# Altium PCB relay.PcbDoc
Units mm, origin at the board's own origin, x right, y up, seen from the top; angles counter-clockwise.
Board outline 53.97 x 65.91 mm, 2 copper layers (Top Layer, Bottom Layer); 33 components, 27 nets, 138 pads, 1820 vias.
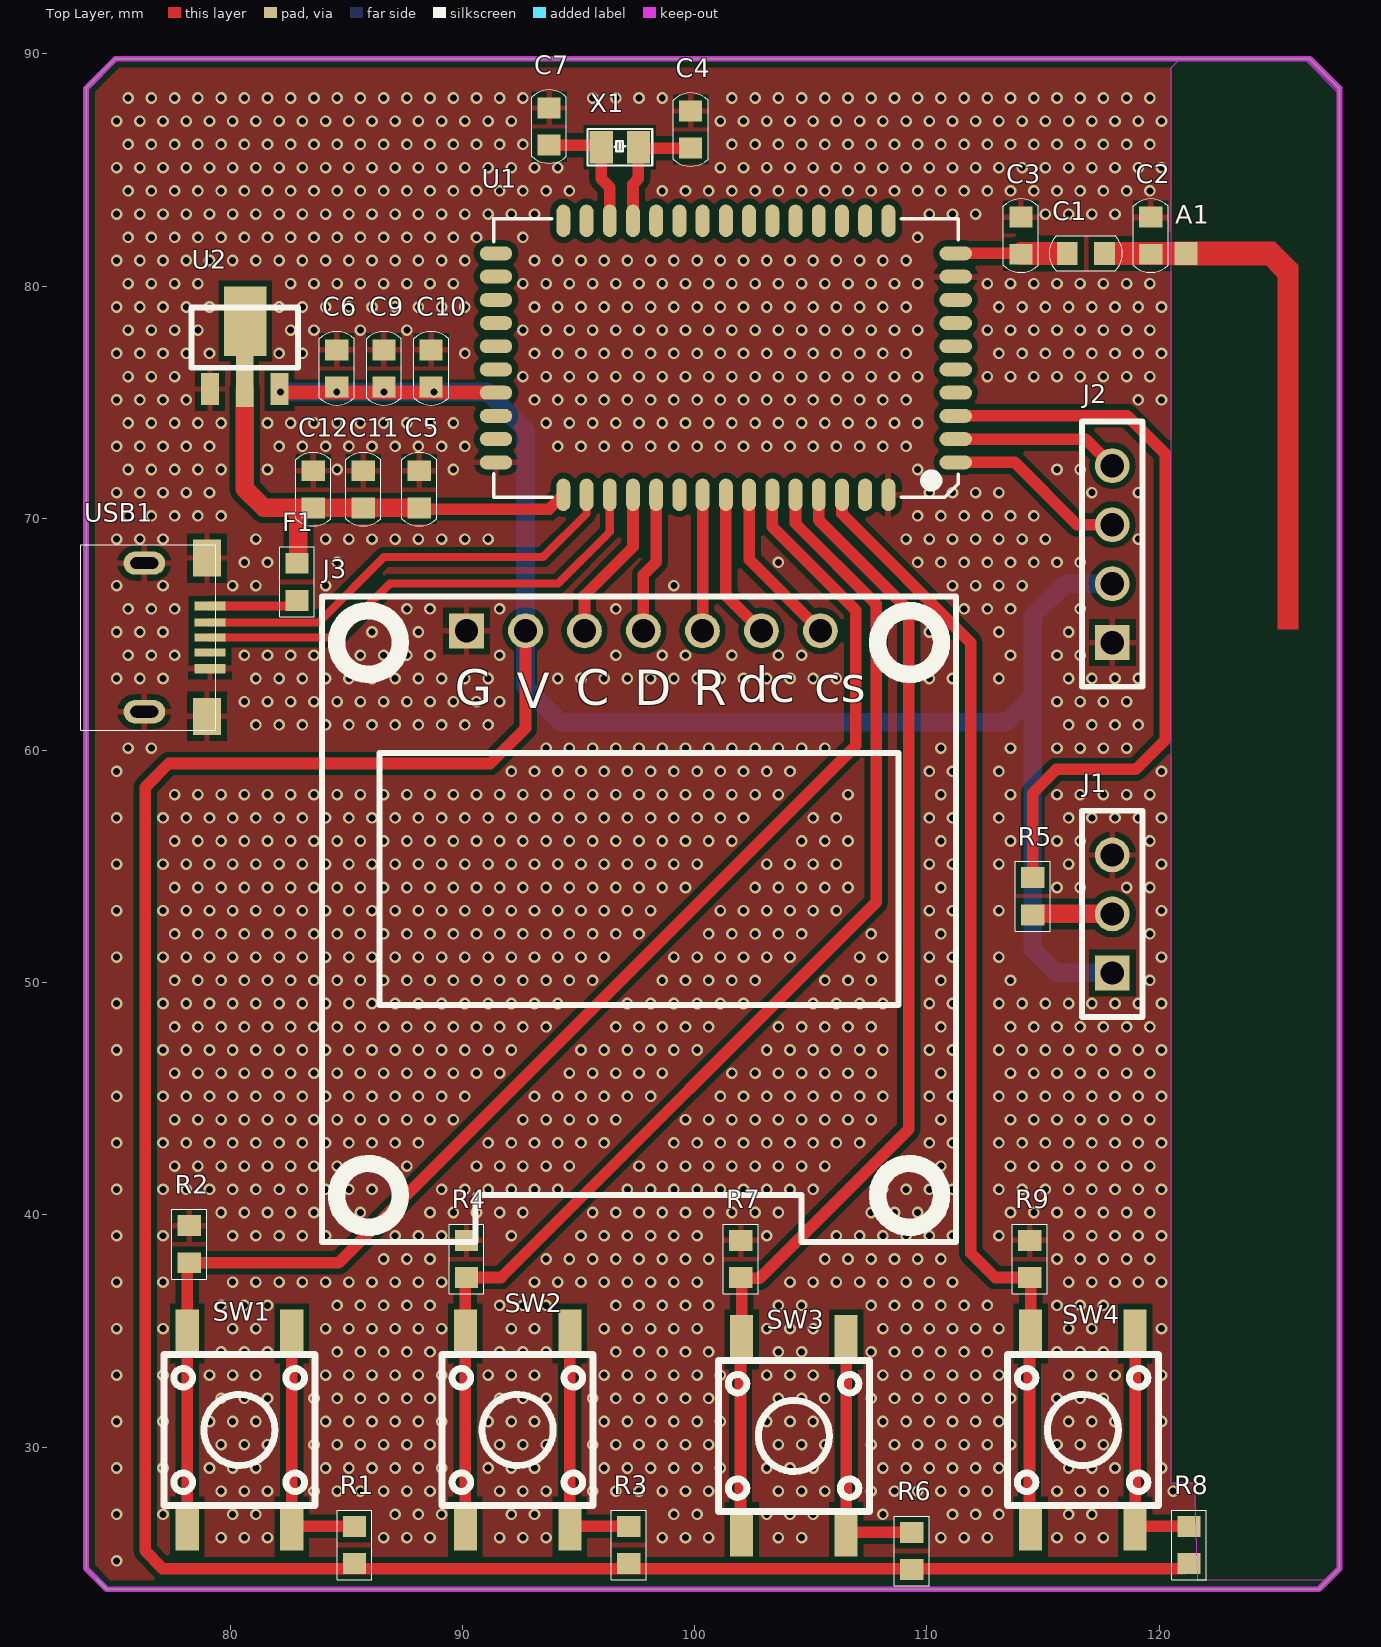
[diagram p0: Top Layer view]
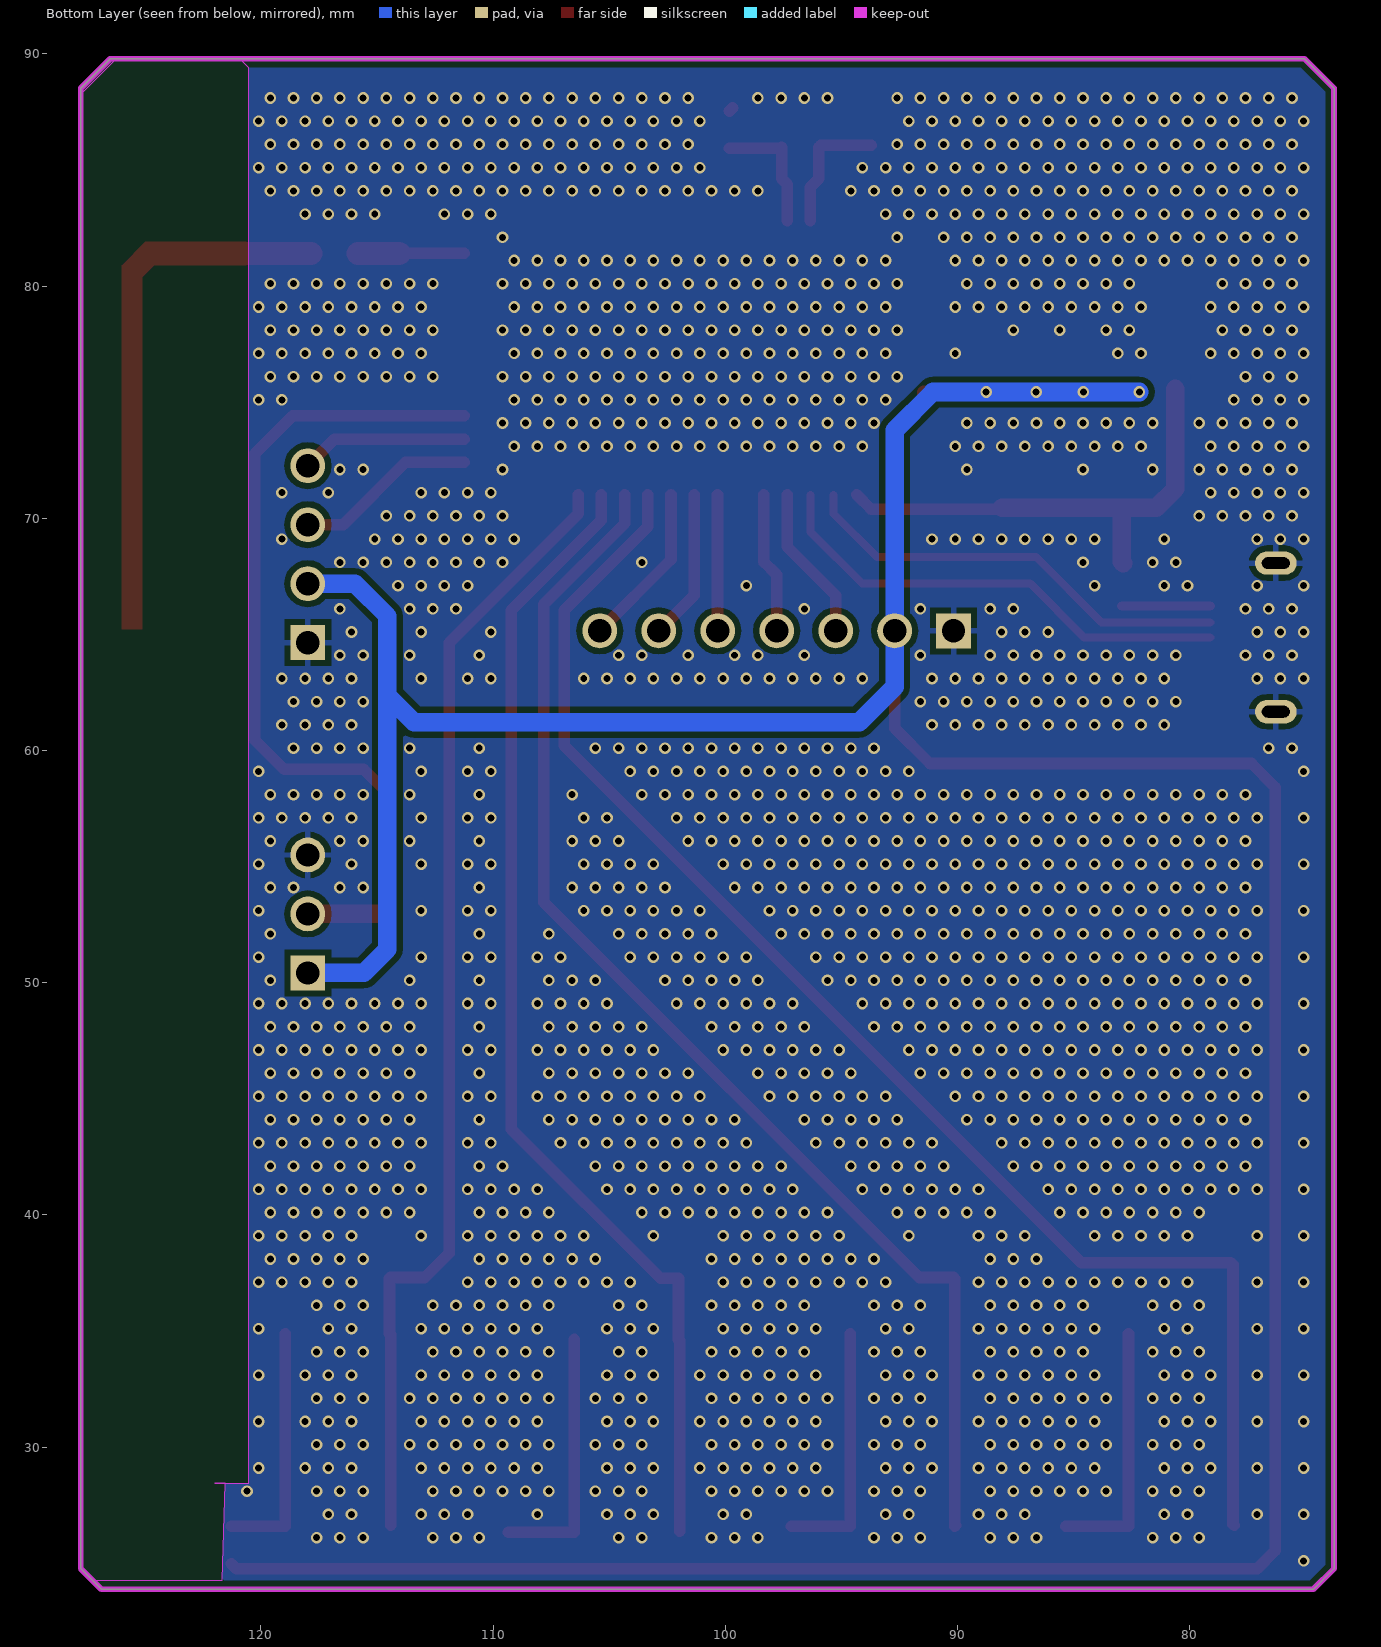
[diagram p1: Bottom Layer view, seen from below]

## Layer stack, top to bottom
Top Solder: solder mask 0.0102, Solder Resist, Dk 3.5
Top Layer: signal copper 0.0356
Dielectric 1: dielectric 0.32, FR-4, Dk 4.8
Bottom Layer: signal copper 0.0356
Bottom Solder: solder mask 0.0102, Solder Resist, Dk 3.5

## Board outline
73.787,24.765 74.676,23.876 126.873,23.876 127.762,24.765 127.762,88.519 126.492,89.789 75.057,89.789 73.787,88.519

## Design rules (kind name [scope] priority, off if disabled: settings)
Clearance [All] p1: gap=0.254
PlaneConnect [All] p1: planeconnectstyle=Direct reliefexpansion=0.508 reliefentries=4 reliefconductorwidth=0.254 reliefairgap=0.254
PolygonConnect PolygonConnect_1 [All vs IsVia] p1: connectstyle=Direct reliefconductorwidth=0.254 reliefentries=4 polygonreliefangle="90 Angle" airgapwidth=0.254
PolygonConnect [All] p2: connectstyle=Relief reliefconductorwidth=0.254 reliefentries=4 polygonreliefangle="90 Angle" airgapwidth=0.254
RoutingVias [All] p1: holewidth=0.711 width=1.27 viastyle="Through Hole" minholewidth=0.711 minwidth=1.27 maxholewidth=0.711 maxwidth=1.27
SolderMaskExpansion [All] p1: expansion=0.102
Width [All] p1: maxlimit=2 minlimit=0.254 preferedwidth=0.254
29 further rules are at their usual default settings.

## Components (designator, comment, footprint, x,y, rotation, side; value= is the part's Value field where it differs from the comment)
A1 "ANTENNA" AN2 121.158,81.407 r0 top
C1 "CAP" cap0603(1608) 116.84,81.407 r180 top
C2 "CAP" cap0603(1608) 119.634,82.169 r270 top
C3 "CAP" cap0603(1608) 114.046,82.169 r90 top
C4 "CAP" cap0603(1608) 99.822,86.741 r270 top
C5 "CC103" cap0603(1608) 88.138,71.247 r90 top
C6 "CC103" cap0603(1608) 84.582,76.454 r90 top
C7 "CAP" cap0603(1608) 93.726,86.868 r270 top
C9 "CC103" cap0603(1608) 86.614,76.454 r90 top
C10 "CC103" cap0603(1608) 88.646,76.454 r90 top
C11 "CC103" cap0603(1608) 85.725,71.247 r90 top
C12 "CC103" cap0603(1608) 83.566,71.247 r90 top
F1 "1A" RESC0603(1608)_N 82.873,67.262 r270 top
J1 "ROLE" HEAD-1x3-2.54 117.983,50.419 r90 top (schematic designator J?)
J2 "SWD" HEAD-1x4-2.54 117.983,64.643 r90 top
J3 "OLED" OLED_MOD_0.96_1 90.17,65.151 r0 top
R1 "10K" RESC0603(1608)_N 85.344,25.781 r270 top
R2 "100K" RESC0603(1608)_N 78.232,38.735 r270 top
R3 "10K" RESC0603(1608)_N 97.155,25.781 r270 top
R4 "100K" RESC0603(1608)_N 90.17,38.1 r90 top
R5 "47K" RESC0603(1608)_N 114.554,53.721 r90 top
R6 "10K" RESC0603(1608)_N 109.347,25.527 r270 top
R7 "100K" RESC0603(1608)_N 101.981,38.1 r270 top
R8 "10K" RESC0603(1608)_N 121.285,25.781 r270 top
R9 "10K" RESC0603(1608)_N 114.427,38.1 r270 top
SW1 "TACT" SW_6X6X5mm 80.391,30.734 r90 top
SW2 "TACT" SW_6X6X5mm 92.371,30.734 r90 top
SW3 "TACT" SW_6X6X5mm 104.267,30.48 r90 top
SW4 "TACT" SW_6X6X5mm 116.713,30.734 r90 top
U1 "MO100F7, nRF52840 module, YuLiWuLi" MO100F7 91.44,81.407 r270 top locked
U2 "HT7333" HT7333-SOT-89 79.121,75.565 r0 top
USB1 "32010-05002-1220" "MICRO USB" 79.121,66.217 r90 top
X1 "32.768KHz" 32.768_A 96.774,85.979 r0 top

## Footprints (in the part's own frame and the unit in brackets; to place one, negate y for a bottom-side part, rotate by r counter-clockwise, add the part's x,y. Pads: shape width x height; smd on the part's side, far side on the other; paste and mask are expansions set on the pad)
32.768_A [mm]
  rect 1x1.4 smd mask+0.05: 1(-0.8,0) 2(0.8,0)
  silkscreen extent -1.4,-0.79 1.4,0.79, body extent -1.1,-0.67 1.1,0.68, height 0.7
AN2 [mm]
  rect 1x1 smd: 1(0,0)
  Top Layer region: -0.534,0.522 -0.534,-0.524 3.819,-0.524 3.819,0.522
  Top Layer region: 3.937,-16.202 4.842,-16.202 4.842,-0.501 3.937,-0.501
  Top Layer region: 3.109,-0.188 4.132,-1.211 4.842,-0.501 3.819,0.522
cap0603(1608) [mm] "Chip capcitance, Body 1.6x0.8mm, IPC Medium Density"
  rect 0.9x1 smd: 1(-0.8,0) 2(0.8,0)
  silkscreen extent -1.58,-0.75 1.58,0.75, body extent -0.85,-0.47 0.85,0.47, height 0.6
HEAD-1x3-2.54 [mm]
  rect 1.5x1.5 hole 1: 1(0,0)
  round 1.5 hole 1: 2(2.54,0) 3(5.08,0)
  silkscreen extent -1.9,-1.3 6.98,1.3
HEAD-1x4-2.54 [mm]
  rect 1.5x1.5 hole 1: 1(0,0)
  round 1.5 hole 1: 2(2.54,0) 3(5.08,0) 4(7.62,0)
  silkscreen extent -1.9,-1.3 9.53,1.3
HT7333-SOT-89 [mil]
  rect 30x54 smd: 1(0,0) 3(118,0)
  rect 30x86.61 smd: 2(59,12.76)
  rect 72x118.11 smd: 2(60,115)
  silkscreen extent -32,36 150,138
"MICRO USB" [mm]
  rect 0.4x1.35 smd: 1(0,0) 5(-2.7,0)
  rect 0.35x1.35 smd: 2(-0.7,0) 3(-1.35,0) 4(-2,0)
  oval 1x1.8 hole 0.5 slot 1.2 at 90 deg: 6(1.85,2.827) 7(-4.55,2.827)
  rect 1.6x1.2 smd: 6(2.07,0.127) 7(-4.749,0.127)
  silkscreen extent -5.35,-0.25 2.65,5.56, body extent -5.35,-0.26 2.65,5.56, height 2.77
MO100F7 [mm]
  oval 0.6x1.4 smd mask+0.06: 1(0,0) 2(1,0) 3(2,0) 4(3,0) 5(4,0) 6(5,0) 7(6,0) 8(7,0) 9(8,0) 10(9,0) 26(9,19.8) 27(8,19.8) 28(7,19.8) 29(6,19.8) 30(5,19.8) 31(4,19.8) 32(3,19.8) 33(2,19.8) 34(1,19.8) 35(0,19.8)
  oval 1.4x0.6 smd mask+0.06: 11(10.4,2.9) 12(10.4,3.9) 13(10.4,4.9) 14(10.4,5.9) 15(10.4,6.9) 16(10.4,7.9) 17(10.4,8.9) 18(10.4,9.9) 19(10.4,10.9) 20(10.4,11.9) 21(10.4,12.9) 22(10.4,13.9) 23(10.4,14.9) 24(10.4,15.9) 25(10.4,16.9) 36(-1.4,16.9) 37(-1.4,15.9) 38(-1.4,14.9) 39(-1.4,13.9) 40(-1.4,12.9) 41(-1.4,11.9) 42(-1.4,10.9) 43(-1.4,9.9) 44(-1.4,8.9) 45(-1.4,7.9) 46(-1.4,6.9) 47(-1.4,5.9) 48(-1.4,4.9) 49(-1.4,3.9) 50(-1.4,2.9)
  silkscreen extent -1.5,-0.1 10.5,19.9, body extent -1.52,-0.13 10.54,19.94, height 2.05
OLED_MOD_0.96_1 [mm]
  rect 1.5x1.5 hole 1: 1(0,0)
  round 1.5 hole 1: 2(2.54,0) 3(5.08,0) 4(7.62,0) 5(10.16,0) 6(12.7,0) 7(15.24,0)
  silkscreen extent -6.22,-26.31 21.08,1.49
RESC0603(1608)_N [mm] "Chip Resistor, Body 1.6x0.8mm, IPC Medium Density"
  rect 0.9x1 smd: 1(-0.8,0) 2(0.8,0)
  silkscreen extent -1.5,-0.75 1.5,0.75, body extent -0.85,-0.47 0.85,0.47, height 0.6
SW_6X6X5mm [mm]
  rect 2.1x1 smd: 1(-4.15,2.25) 1(4.15,2.25) 2(-4.15,-2.25) 2(4.15,-2.25)
  silkscreen extent -3.25,-3.25 3.25,3.25, body extent -4.5,-3 4.5,3, height 5

## Part data
A1: "PCB Antenna"
J1: library part HEAD-1x3
J2: library part HEAD-1x4
J3: library part OLED_mod_0.96_1
SW1 SW2 SW3 SW4: library part SWITCH_TACT_SPST_2-2_PINS
U1: library part MO100F7
USB1: library part Component_1, "Mirco_USB_5S_B"
X1: library part Crystal_2PIN

## Via types
v1: diameter 0.5, hole 0.3, Top Layer to Bottom Layer, tented both sides, 1820 vias

## Nets (pads, with @x,y where several pads share a name; then routed paths per layer and width w, separated by ;. In a path a pad name is that pad's centre, name@x,y a point inside that pad or via, vN(x,y) a via of type N, cw(c..) or ccw(c..) an arc to the next point about the centre after c; other vN are vias at no path point)
D+: U1.13 USB1.3 | length 20.7
  Top Layer w0.35: USB1.3 84.552,64.867 86.868,67.183 94.107,67.183 96.34,69.416 U1.13
D-: U1.12 USB1.2 | length 19
  Top Layer w0.35: USB1.2 83.805,65.517 86.614,68.326 93.472,68.326 95.34,70.194 U1.12
GND: C2.1 C3.2 C4.1 C5.2 C6.2 C7.1 C9.2 C10.2 C11.2 C12.2 J1.3 J2.1 J3.1 R2.1 R4.2 R7.1 R9.1 U1.10 U1.25 U1.34 U2.1 USB1.5 USB1.6 USB1.7 | length 0.2
  Top Layer w0.5: C4.1@99.695,87.668 C4.1
  other v1: 75.1,25.1 79.6,26.1 80.6,26.1 81.6,26.1 86.6,26.1 87.6,26.1 88.6,26.1 91.6,26.1 92.6,26.1 93.6,26.1 98.6,26.1 99.6,26.1 100.6,26.1 103.6,26.1 104.6,26.1 110.6,26.1 111.6,26.1 112.6,26.1 115.6,26.1 116.6,26.1 117.6,26.1 75.1,27.1 77.1,27.1 80.1,27.1 81.1,27.1 87.1,27.1 88.1,27.1 89.1,27.1 92.1,27.1 93.1,27.1 99.1,27.1 100.1,27.1 103.1,27.1 104.1,27.1 105.1,27.1 108.1,27.1 111.1,27.1 112.1,27.1 113.1,27.1 116.1,27.1 117.1,27.1 79.6,28.1 80.6,28.1 81.6,28.1 83.6,28.1 84.6,28.1 85.6,28.1 86.6,28.1 87.6,28.1 88.6,28.1 91.6,28.1 92.6,28.1 93.6,28.1 95.6,28.1 96.6,28.1 97.6,28.1 98.6,28.1 99.6,28.1 100.6,28.1 103.6,28.1 104.6,28.1 105.6,28.1 107.6,28.1 108.6,28.1 109.6,28.1 110.6,28.1 111.6,28.1 112.6,28.1 115.6,28.1 116.6,28.1 117.6,28.1 120.6,28.1 75.1,29.1 77.1,29.1 79.1,29.1 80.1,29.1 81.1,29.1 84.1,29.1 85.1,29.1 86.1,29.1 87.1,29.1 88.1,29.1 89.1,29.1 91.1,29.1 92.1,29.1 93.1,29.1 96.1,29.1 97.1,29.1 98.1,29.1 99.1,29.1 100.1,29.1 101.1,29.1 103.1,29.1 104.1,29.1 105.1,29.1 108.1,29.1 109.1,29.1 110.1,29.1 111.1,29.1 112.1,29.1 113.1,29.1 116.1,29.1 117.1,29.1 118.1,29.1 120.1,29.1 79.6,30.1 80.6,30.1 81.6,30.1 83.6,30.1 84.6,30.1 85.6,30.1 86.6,30.1 87.6,30.1 88.6,30.1 91.6,30.1 92.6,30.1 93.6,30.1 95.6,30.1 96.6,30.1 97.6,30.1 98.6,30.1 99.6,30.1 100.6,30.1 103.6,30.1 104.6,30.1 105.6,30.1 107.6,30.1 108.6,30.1 109.6,30.1 110.6,30.1 111.6,30.1 112.6,30.1 113.6,30.1 115.6,30.1 116.6,30.1 117.6,30.1 75.1,31.1 77.1,31.1 79.1,31.1 80.1,31.1 81.1,31.1 84.1,31.1 85.1,31.1 86.1,31.1 87.1,31.1 88.1,31.1 89.1,31.1 91.1,31.1 92.1,31.1 93.1,31.1 96.1,31.1 97.1,31.1 98.1,31.1 99.1,31.1 100.1,31.1 101.1,31.1 103.1,31.1 104.1,31.1 105.1,31.1 108.1,31.1 109.1,31.1 110.1,31.1 111.1,31.1 112.1,31.1 113.1,31.1 116.1,31.1 117.1,31.1 118.1,31.1 120.1,31.1 79.6,32.1 80.6,32.1 81.6,32.1 83.6,32.1 84.6,32.1 85.6,32.1 86.6,32.1 87.6,32.1 88.6,32.1 91.6,32.1 92.6,32.1 93.6,32.1 95.6,32.1 96.6,32.1 97.6,32.1 98.6,32.1 99.6,32.1 100.6,32.1 103.6,32.1 104.6,32.1 105.6,32.1 107.6,32.1 108.6,32.1 109.6,32.1 110.6,32.1 111.6,32.1 112.6,32.1 113.6,32.1 115.6,32.1 116.6,32.1 117.6,32.1 75.1,33.1 77.1,33.1 79.1,33.1 80.1,33.1 81.1,33.1 84.1,33.1 85.1,33.1 86.1,33.1 87.1,33.1 88.1,33.1 89.1,33.1 91.1,33.1 92.1,33.1 93.1,33.1 96.1,33.1 97.1,33.1 98.1,33.1 99.1,33.1 100.1,33.1 101.1,33.1 103.1,33.1 104.1,33.1 105.1,33.1 108.1,33.1 109.1,33.1 110.1,33.1 111.1,33.1 112.1,33.1 113.1,33.1 116.1,33.1 117.1,33.1 118.1,33.1 120.1,33.1 79.6,34.1 80.6,34.1 81.6,34.1 84.6,34.1 85.6,34.1 86.6,34.1 87.6,34.1 88.6,34.1 91.6,34.1 92.6,34.1 93.6,34.1 96.6,34.1 97.6,34.1 98.6,34.1 99.6,34.1 100.6,34.1 103.6,34.1 104.6,34.1 107.6,34.1 108.6,34.1 109.6,34.1 110.6,34.1 111.6,34.1 112.6,34.1 115.6,34.1 116.6,34.1 117.6,34.1 75.1,35.1 77.1,35.1 80.1,35.1 81.1,35.1 84.1,35.1 85.1,35.1 86.1,35.1 87.1,35.1 88.1,35.1 89.1,35.1 92.1,35.1 93.1,35.1 96.1,35.1 97.1,35.1 98.1,35.1 99.1,35.1 100.1,35.1 103.1,35.1 104.1,35.1 105.1,35.1 108.1,35.1 109.1,35.1 110.1,35.1 111.1,35.1 112.1,35.1 113.1,35.1 116.1,35.1 117.1,35.1 120.1,35.1 79.6,36.1 80.6,36.1 81.6,36.1 84.6,36.1 85.6,36.1 86.6,36.1 87.6,36.1 88.6,36.1 91.6,36.1 92.6,36.1 93.6,36.1 96.6,36.1 97.6,36.1 98.6,36.1 99.6,36.1 100.6,36.1 103.6,36.1 104.6,36.1 107.6,36.1 108.6,36.1 109.6,36.1 110.6,36.1 111.6,36.1 112.6,36.1 115.6,36.1 116.6,36.1 117.6,36.1 75.1,37.1 77.1,37.1 80.1,37.1 81.1,37.1 82.1,37.1 83.1,37.1 84.1,37.1 85.1,37.1 86.1,37.1 87.1,37.1 88.1,37.1 89.1,37.1 93.1,37.1 94.1,37.1 95.1,37.1 96.1,37.1 97.1,37.1 98.1,37.1 99.1,37.1 100.1,37.1 104.1,37.1 105.1,37.1 106.1,37.1 107.1,37.1 108.1,37.1 109.1,37.1 110.1,37.1 111.1,37.1 116.1,37.1 117.1,37.1 118.1,37.1 119.1,37.1 120.1,37.1 86.6,38.1 87.6,38.1 88.6,38.1 93.6,38.1 94.6,38.1 95.6,38.1 96.6,38.1 97.6,38.1 98.6,38.1 99.6,38.1 100.6,38.1 105.6,38.1 106.6,38.1 107.6,38.1 108.6,38.1 109.6,38.1 110.6,38.1 115.6,38.1 116.6,38.1 117.6,38.1 118.6,38.1 119.6,38.1 75.1,39.1 77.1,39.1 80.1,39.1 81.1,39.1 82.1,39.1 83.1,39.1 84.1,39.1 87.1,39.1 88.1,39.1 89.1,39.1 92.1,39.1 95.1,39.1 96.1,39.1 97.1,39.1 98.1,39.1 99.1,39.1 100.1,39.1 103.1,39.1 106.1,39.1 107.1,39.1 108.1,39.1 109.1,39.1 110.1,39.1 111.1,39.1 113.1,39.1 116.1,39.1 117.1,39.1 118.1,39.1 119.1,39.1 120.1,39.1 79.6,40.1 80.6,40.1 81.6,40.1 82.6,40.1 83.6,40.1 84.6,40.1 85.6,40.1 88.6,40.1 89.6,40.1 90.6,40.1 91.6,40.1 92.6,40.1 95.6,40.1 96.6,40.1 97.6,40.1 98.6,40.1 99.6,40.1 100.6,40.1 101.6,40.1 102.6,40.1 103.6,40.1 107.6,40.1 108.6,40.1 109.6,40.1 110.6,40.1 113.6,40.1 114.6,40.1 115.6,40.1 116.6,40.1 117.6,40.1 118.6,40.1 119.6,40.1 75.1,41.1 77.1,41.1 78.1,41.1 79.1,41.1 80.1,41.1 81.1,41.1 82.1,41.1 83.1,41.1 84.1,41.1 85.1,41.1 86.1,41.1 89.1,41.1 90.1,41.1 91.1,41.1 92.1,41.1 93.1,41.1 94.1,41.1 97.1,41.1 98.1,41.1 99.1,41.1 100.1,41.1 101.1,41.1 102.1,41.1 103.1,41.1 104.1,41.1 105.1,41.1 108.1,41.1 109.1,41.1 110.1,41.1 111.1,41.1 113.1,41.1 114.1,41.1 115.1,41.1 116.1,41.1 117.1,41.1 118.1,41.1 119.1,41.1 120.1,41.1 77.6,42.1 78.6,42.1 79.6,42.1 80.6,42.1 81.6,42.1 82.6,42.1 83.6,42.1 84.6,42.1 85.6,42.1 86.6,42.1 87.6,42.1 90.6,42.1 91.6,42.1 92.6,42.1 93.6,42.1 94.6,42.1 97.6,42.1 98.6,42.1 99.6,42.1 100.6,42.1 101.6,42.1 102.6,42.1 103.6,42.1 104.6,42.1 105.6,42.1 109.6,42.1 110.6,42.1 113.6,42.1 114.6,42.1 115.6,42.1 116.6,42.1 117.6,42.1 118.6,42.1 119.6,42.1 75.1,43.1 77.1,43.1 78.1,43.1 79.1,43.1 80.1,43.1 81.1,43.1 82.1,43.1 83.1,43.1 84.1,43.1 85.1,43.1 86.1,43.1 87.1,43.1 88.1,43.1 91.1,43.1 92.1,43.1 93.1,43.1 94.1,43.1 95.1,43.1 96.1,43.1 99.1,43.1 100.1,43.1 101.1,43.1 102.1,43.1 103.1,43.1 104.1,43.1 105.1,43.1 106.1,43.1 107.1,43.1 110.1,43.1 111.1,43.1 113.1,43.1 114.1,43.1 115.1,43.1 116.1,43.1 117.1,43.1 118.1,43.1 119.1,43.1 120.1,43.1 77.6,44.1 78.6,44.1 79.6,44.1 80.6,44.1 81.6,44.1 82.6,44.1 83.6,44.1 84.6,44.1 85.6,44.1 86.6,44.1 87.6,44.1 88.6,44.1 89.6,44.1 92.6,44.1 93.6,44.1 94.6,44.1 95.6,44.1 96.6,44.1 99.6,44.1 100.6,44.1 101.6,44.1 102.6,44.1 103.6,44.1 104.6,44.1 105.6,44.1 106.6,44.1 107.6,44.1 110.6,44.1 113.6,44.1 114.6,44.1 115.6,44.1 116.6,44.1 117.6,44.1 118.6,44.1 119.6,44.1 75.1,45.1 77.1,45.1 78.1,45.1 79.1,45.1 80.1,45.1 81.1,45.1 82.1,45.1 83.1,45.1 84.1,45.1 85.1,45.1 86.1,45.1 87.1,45.1 88.1,45.1 89.1,45.1 90.1,45.1 93.1,45.1 94.1,45.1 95.1,45.1 96.1,45.1 97.1,45.1 98.1,45.1 101.1,45.1 102.1,45.1 103.1,45.1 104.1,45.1 105.1,45.1 106.1,45.1 107.1,45.1 108.1,45.1 110.1,45.1 111.1,45.1 113.1,45.1 114.1,45.1 115.1,45.1 116.1,45.1 117.1,45.1 118.1,45.1 119.1,45.1 120.1,45.1 77.6,46.1 78.6,46.1 79.6,46.1 80.6,46.1 81.6,46.1 82.6,46.1 83.6,46.1 84.6,46.1 85.6,46.1 86.6,46.1 87.6,46.1 88.6,46.1 89.6,46.1 90.6,46.1 91.6,46.1 94.6,46.1 95.6,46.1 96.6,46.1 97.6,46.1 98.6,46.1 101.6,46.1 102.6,46.1 103.6,46.1 104.6,46.1 105.6,46.1 106.6,46.1 107.6,46.1 110.6,46.1 113.6,46.1 114.6,46.1 115.6,46.1 116.6,46.1 117.6,46.1 118.6,46.1 119.6,46.1 75.1,47.1 77.1,47.1 78.1,47.1 79.1,47.1 80.1,47.1 81.1,47.1 82.1,47.1 83.1,47.1 84.1,47.1 85.1,47.1 86.1,47.1 87.1,47.1 88.1,47.1 89.1,47.1 90.1,47.1 91.1,47.1 92.1,47.1 95.1,47.1 96.1,47.1 97.1,47.1 98.1,47.1 99.1,47.1 100.1,47.1 103.1,47.1 104.1,47.1 105.1,47.1 106.1,47.1 107.1,47.1 108.1,47.1 110.1,47.1 111.1,47.1 113.1,47.1 114.1,47.1 115.1,47.1 116.1,47.1 117.1,47.1 118.1,47.1 119.1,47.1 120.1,47.1 77.6,48.1 78.6,48.1 79.6,48.1 80.6,48.1 81.6,48.1 82.6,48.1 83.6,48.1 84.6,48.1 85.6,48.1 86.6,48.1 87.6,48.1 88.6,48.1 89.6,48.1 90.6,48.1 91.6,48.1 92.6,48.1 93.6,48.1 96.6,48.1 97.6,48.1 98.6,48.1 99.6,48.1 100.6,48.1 103.6,48.1 104.6,48.1 105.6,48.1 106.6,48.1 107.6,48.1 110.6,48.1 113.6,48.1 114.6,48.1 115.6,48.1 116.6,48.1 117.6,48.1 118.6,48.1 119.6,48.1 75.1,49.1 77.1,49.1 78.1,49.1 79.1,49.1 80.1,49.1 81.1,49.1 82.1,49.1 83.1,49.1 84.1,49.1 85.1,49.1 86.1,49.1 87.1,49.1 88.1,49.1 89.1,49.1 90.1,49.1 91.1,49.1 92.1,49.1 93.1,49.1 94.1,49.1 97.1,49.1 98.1,49.1 99.1,49.1 100.1,49.1 101.1,49.1 102.1,49.1 105.1,49.1 106.1,49.1 107.1,49.1 108.1,49.1 110.1,49.1 111.1,49.1 113.1,49.1 114.1,49.1 115.1,49.1 116.1,49.1 117.1,49.1 118.1,49.1 119.1,49.1 120.1,49.1 77.6,50.1 78.6,50.1 79.6,50.1 80.6,50.1 81.6,50.1 82.6,50.1 83.6,50.1 84.6,50.1 85.6,50.1 86.6,50.1 87.6,50.1 88.6,50.1 89.6,50.1 90.6,50.1 91.6,50.1 92.6,50.1 93.6,50.1 94.6,50.1 95.6,50.1 98.6,50.1 99.6,50.1 100.6,50.1 101.6,50.1 102.6,50.1 105.6,50.1 106.6,50.1 107.6,50.1 110.6,50.1 113.6,50.1 119.6,50.1 75.1,51.1 77.1,51.1 78.1,51.1 79.1,51.1 80.1,51.1 81.1,51.1 82.1,51.1 83.1,51.1 84.1,51.1 85.1,51.1 86.1,51.1 87.1,51.1 88.1,51.1 89.1,51.1 90.1,51.1 91.1,51.1 92.1,51.1 93.1,51.1 94.1,51.1 95.1,51.1 96.1,51.1 99.1,51.1 100.1,51.1 101.1,51.1 102.1,51.1 103.1,51.1 104.1,51.1 107.1,51.1 108.1,51.1 110.1,51.1 111.1,51.1 113.1,51.1 120.1,51.1 77.6,52.1 78.6,52.1 79.6,52.1 80.6,52.1 81.6,52.1 82.6,52.1 83.6,52.1 84.6,52.1 85.6,52.1 86.6,52.1 87.6,52.1 88.6,52.1 89.6,52.1 90.6,52.1 91.6,52.1 92.6,52.1 93.6,52.1 94.6,52.1 95.6,52.1 96.6,52.1 97.6,52.1 100.6,52.1 101.6,52.1 102.6,52.1 103.6,52.1 104.6,52.1 107.6,52.1 110.6,52.1 119.6,52.1 75.1,53.1 77.1,53.1 78.1,53.1 79.1,53.1 80.1,53.1 81.1,53.1 82.1,53.1 83.1,53.1 84.1,53.1 85.1,53.1 86.1,53.1 87.1,53.1 88.1,53.1 89.1,53.1 90.1,53.1 91.1,53.1 92.1,53.1 93.1,53.1 94.1,53.1 95.1,53.1 96.1,53.1 97.1,53.1 98.1,53.1 101.1,53.1 102.1,53.1 103.1,53.1 104.1,53.1 105.1,53.1 106.1,53.1 110.1,53.1 111.1,53.1 113.1,53.1 120.1,53.1 77.6,54.1 78.6,54.1 79.6,54.1 80.6,54.1 81.6,54.1 82.6,54.1 83.6,54.1 84.6,54.1 85.6,54.1 86.6,54.1 87.6,54.1 88.6,54.1 89.6,54.1 90.6,54.1 91.6,54.1 92.6,54.1 93.6,54.1 94.6,54.1 95.6,54.1 96.6,54.1 97.6,54.1 98.6,54.1 99.6,54.1 102.6,54.1 103.6,54.1 104.6,54.1 105.6,54.1 106.6,54.1 110.6,54.1 115.6,54.1 116.6,54.1 118.6,54.1 119.6,54.1 75.1,55.1 77.1,55.1 78.1,55.1 79.1,55.1 80.1,55.1 81.1,55.1 82.1,55.1 83.1,55.1 84.1,55.1 85.1,55.1 86.1,55.1 87.1,55.1 88.1,55.1 89.1,55.1 90.1,55.1 91.1,55.1 92.1,55.1 93.1,55.1 94.1,55.1 95.1,55.1 96.1,55.1 97.1,55.1 98.1,55.1 99.1,55.1 100.1,55.1 103.1,55.1 104.1,55.1 105.1,55.1 106.1,55.1 110.1,55.1 111.1,55.1 113.1,55.1 116.1,55.1 120.1,55.1 77.6,56.1 78.6,56.1 79.6,56.1 80.6,56.1 81.6,56.1 82.6,56.1 83.6,56.1 84.6,56.1 85.6,56.1 86.6,56.1 87.6,56.1 88.6,56.1 89.6,56.1 90.6,56.1 91.6,56.1 92.6,56.1 93.6,56.1 94.6,56.1 95.6,56.1 96.6,56.1 97.6,56.1 98.6,56.1 99.6,56.1 100.6,56.1 101.6,56.1 104.6,56.1 105.6,56.1 106.6,56.1 110.6,56.1 113.6,56.1 115.6,56.1 116.6,56.1 119.6,56.1 75.1,57.1 77.1,57.1 78.1,57.1 79.1,57.1 80.1,57.1 81.1,57.1 82.1,57.1 83.1,57.1 84.1,57.1 85.1,57.1 86.1,57.1 87.1,57.1 88.1,57.1 89.1,57.1 90.1,57.1 91.1,57.1 92.1,57.1 93.1,57.1 94.1,57.1 95.1,57.1 96.1,57.1 97.1,57.1 98.1,57.1 99.1,57.1 100.1,57.1 101.1,57.1 102.1,57.1 105.1,57.1 106.1,57.1 110.1,57.1 111.1,57.1 113.1,57.1 116.1,57.1 117.1,57.1 118.1,57.1 119.1,57.1 120.1,57.1 77.6,58.1 78.6,58.1 79.6,58.1 80.6,58.1 81.6,58.1 82.6,58.1 83.6,58.1 84.6,58.1 85.6,58.1 86.6,58.1 87.6,58.1 88.6,58.1 89.6,58.1 90.6,58.1 91.6,58.1 92.6,58.1 93.6,58.1 94.6,58.1 95.6,58.1 96.6,58.1 97.6,58.1 98.6,58.1 99.6,58.1 100.6,58.1 101.6,58.1 102.6,58.1 103.6,58.1 106.6,58.1 110.6,58.1 113.6,58.1 115.6,58.1 116.6,58.1 117.6,58.1 118.6,58.1 119.6,58.1 75.1,59.1 92.1,59.1 93.1,59.1 94.1,59.1 95.1,59.1 96.1,59.1 97.1,59.1 98.1,59.1 99.1,59.1 100.1,59.1 101.1,59.1 102.1,59.1 103.1,59.1 104.1,59.1 110.1,59.1 111.1,59.1 113.1,59.1 120.1,59.1 75.6,60.1 76.6,60.1 93.6,60.1 94.6,60.1 95.6,60.1 96.6,60.1 97.6,60.1 98.6,60.1 99.6,60.1 100.6,60.1 101.6,60.1 102.6,60.1 103.6,60.1 104.6,60.1 105.6,60.1 110.6,60.1 113.6,60.1 115.6,60.1 116.6,60.1 117.6,60.1 118.6,60.1 81.1,61.1 82.1,61.1 83.1,61.1 84.1,61.1 85.1,61.1 86.1,61.1 87.1,61.1 88.1,61.1 89.1,61.1 90.1,61.1 91.1,61.1 116.1,61.1 117.1,61.1 118.1,61.1 119.1,61.1 80.6,62.1 81.6,62.1 82.6,62.1 83.6,62.1 84.6,62.1 85.6,62.1 86.6,62.1 87.6,62.1 88.6,62.1 89.6,62.1 90.6,62.1 91.6,62.1 115.6,62.1 116.6,62.1 117.6,62.1 118.6,62.1 75.1,63.1 76.1,63.1 77.1,63.1 81.1,63.1 82.1,63.1 83.1,63.1 84.1,63.1 85.1,63.1 86.1,63.1 87.1,63.1 88.1,63.1 89.1,63.1 90.1,63.1 91.1,63.1 94.1,63.1 95.1,63.1 96.1,63.1 97.1,63.1 98.1,63.1 99.1,63.1 100.1,63.1 101.1,63.1 102.1,63.1 103.1,63.1 104.1,63.1 105.1,63.1 106.1,63.1 110.1,63.1 111.1,63.1 113.1,63.1 116.1,63.1 117.1,63.1 118.1,63.1 119.1,63.1 75.6,64.1 76.6,64.1 77.6,64.1 80.6,64.1 81.6,64.1 82.6,64.1 83.6,64.1 84.6,64.1 85.6,64.1 86.6,64.1 87.6,64.1 88.6,64.1 91.6,64.1 96.6,64.1 98.6,64.1 99.6,64.1 101.6,64.1 103.6,64.1 104.6,64.1 110.6,64.1 113.6,64.1 115.6,64.1 116.6,64.1 75.1,65.1 76.1,65.1 77.1,65.1 86.1,65.1 87.1,65.1 88.1,65.1 110.1,65.1 113.1,65.1 116.1,65.1 75.6,66.1 76.6,66.1 77.6,66.1 87.6,66.1 88.6,66.1 91.6,66.1 96.6,66.1 111.6,66.1 112.6,66.1 113.6,66.1 116.6,66.1 75.1,67.1 77.1,67.1 80.1,67.1 81.1,67.1 84.1,67.1 99.1,67.1 111.1,67.1 112.1,67.1 113.1,67.1 114.1,67.1 80.6,68.1 81.6,68.1 84.6,68.1 103.6,68.1 109.6,68.1 110.6,68.1 111.6,68.1 112.6,68.1 113.6,68.1 114.6,68.1 115.6,68.1 116.6,68.1 75.1,69.1 76.1,69.1 77.1,69.1 81.1,69.1 84.1,69.1 85.1,69.1 86.1,69.1 87.1,69.1 88.1,69.1 89.1,69.1 90.1,69.1 91.1,69.1 109.1,69.1 110.1,69.1 111.1,69.1 112.1,69.1 113.1,69.1 114.1,69.1 115.1,69.1 119.1,69.1 75.6,70.1 76.6,70.1 77.6,70.1 78.6,70.1 79.6,70.1 109.6,70.1 110.6,70.1 111.6,70.1 112.6,70.1 113.6,70.1 114.6,70.1 75.1,71.1 76.1,71.1 77.1,71.1 78.1,71.1 79.1,71.1 110.1,71.1 111.1,71.1 112.1,71.1 113.1,71.1 117.1,71.1 119.1,71.1 75.6,72.1 76.6,72.1 77.6,72.1 78.6,72.1 79.6,72.1 81.6,72.1 84.6,72.1 89.6,72.1 109.6,72.1 115.6,72.1 116.6,72.1 75.1,73.1 76.1,73.1 77.1,73.1 78.1,73.1 79.1,73.1 82.1,73.1 83.1,73.1 84.1,73.1 85.1,73.1 86.1,73.1 87.1,73.1 88.1,73.1 89.1,73.1 90.1,73.1 94.1,73.1 95.1,73.1 96.1,73.1 97.1,73.1 98.1,73.1 99.1,73.1 100.1,73.1 101.1,73.1 102.1,73.1 103.1,73.1 104.1,73.1 105.1,73.1 106.1,73.1 107.1,73.1 108.1,73.1 109.1,73.1 75.6,74.1 76.6,74.1 77.6,74.1 78.6,74.1 79.6,74.1 81.6,74.1 82.6,74.1 83.6,74.1 84.6,74.1 85.6,74.1 86.6,74.1 87.6,74.1 88.6,74.1 89.6,74.1 93.6,74.1 94.6,74.1 95.6,74.1 96.6,74.1 97.6,74.1 98.6,74.1 99.6,74.1 100.6,74.1 101.6,74.1 102.6,74.1 103.6,74.1 104.6,74.1 105.6,74.1 106.6,74.1 107.6,74.1 108.6,74.1 109.6,74.1 75.1,75.1 76.1,75.1 77.1,75.1 78.1,75.1 93.1,75.1 94.1,75.1 95.1,75.1 96.1,75.1 97.1,75.1 98.1,75.1 99.1,75.1 100.1,75.1 101.1,75.1 102.1,75.1 103.1,75.1 104.1,75.1 105.1,75.1 106.1,75.1 107.1,75.1 108.1,75.1 109.1,75.1 119.1,75.1 120.1,75.1 75.6,76.1 76.6,76.1 77.6,76.1 92.6,76.1 93.6,76.1 94.6,76.1 95.6,76.1 96.6,76.1 97.6,76.1 98.6,76.1 99.6,76.1 100.6,76.1 101.6,76.1 102.6,76.1 103.6,76.1 104.6,76.1 105.6,76.1 106.6,76.1 107.6,76.1 108.6,76.1 109.6,76.1 112.6,76.1 113.6,76.1 114.6,76.1 115.6,76.1 116.6,76.1 117.6,76.1 118.6,76.1 119.6,76.1 75.1,77.1 76.1,77.1 77.1,77.1 78.1,77.1 79.1,77.1 82.1,77.1 83.1,77.1 90.1,77.1 93.1,77.1 94.1,77.1 95.1,77.1 96.1,77.1 97.1,77.1 98.1,77.1 99.1,77.1 100.1,77.1 101.1,77.1 102.1,77.1 103.1,77.1 104.1,77.1 105.1,77.1 106.1,77.1 107.1,77.1 108.1,77.1 109.1,77.1 113.1,77.1 114.1,77.1 115.1,77.1 116.1,77.1 117.1,77.1 118.1,77.1 119.1,77.1 120.1,77.1 75.6,78.1 76.6,78.1 77.6,78.1 78.6,78.1 82.6,78.1 83.6,78.1 85.6,78.1 87.6,78.1 92.6,78.1 93.6,78.1 94.6,78.1 95.6,78.1 96.6,78.1 97.6,78.1 98.6,78.1 99.6,78.1 100.6,78.1 101.6,78.1 102.6,78.1 103.6,78.1 104.6,78.1 105.6,78.1 106.6,78.1 107.6,78.1 108.6,78.1 109.6,78.1 112.6,78.1 113.6,78.1 114.6,78.1 115.6,78.1 116.6,78.1 117.6,78.1 118.6,78.1 119.6,78.1 75.1,79.1 76.1,79.1 77.1,79.1 78.1,79.1 79.1,79.1 82.1,79.1 83.1,79.1 84.1,79.1 85.1,79.1 86.1,79.1 87.1,79.1 88.1,79.1 89.1,79.1 90.1,79.1 93.1,79.1 94.1,79.1 95.1,79.1 96.1,79.1 97.1,79.1 98.1,79.1 99.1,79.1 100.1,79.1 101.1,79.1 102.1,79.1 103.1,79.1 104.1,79.1 105.1,79.1 106.1,79.1 107.1,79.1 108.1,79.1 109.1,79.1 113.1,79.1 114.1,79.1 115.1,79.1 116.1,79.1 117.1,79.1 118.1,79.1 119.1,79.1 120.1,79.1 75.6,80.1 76.6,80.1 77.6,80.1 78.6,80.1 82.6,80.1 83.6,80.1 84.6,80.1 85.6,80.1 86.6,80.1 87.6,80.1 88.6,80.1 89.6,80.1 92.6,80.1 93.6,80.1 94.6,80.1 95.6,80.1 96.6,80.1 97.6,80.1 98.6,80.1 99.6,80.1 100.6,80.1 101.6,80.1 102.6,80.1 103.6,80.1 104.6,80.1 105.6,80.1 106.6,80.1 107.6,80.1 108.6,80.1 109.6,80.1 112.6,80.1 113.6,80.1 114.6,80.1 115.6,80.1 116.6,80.1 117.6,80.1 118.6,80.1 119.6,80.1 75.1,81.1 76.1,81.1 77.1,81.1 78.1,81.1 79.1,81.1 80.1,81.1 81.1,81.1 82.1,81.1 83.1,81.1 84.1,81.1 85.1,81.1 86.1,81.1 87.1,81.1 88.1,81.1 89.1,81.1 90.1,81.1 93.1,81.1 94.1,81.1 95.1,81.1 96.1,81.1 97.1,81.1 98.1,81.1 99.1,81.1 100.1,81.1 101.1,81.1 102.1,81.1 103.1,81.1 104.1,81.1 105.1,81.1 106.1,81.1 107.1,81.1 108.1,81.1 109.1,81.1 75.6,82.1 76.6,82.1 77.6,82.1 78.6,82.1 79.6,82.1 80.6,82.1 81.6,82.1 82.6,82.1 83.6,82.1 84.6,82.1 85.6,82.1 86.6,82.1 87.6,82.1 88.6,82.1 89.6,82.1 90.6,82.1 92.6,82.1 109.6,82.1 75.1,83.1 76.1,83.1 77.1,83.1 78.1,83.1 79.1,83.1 80.1,83.1 81.1,83.1 82.1,83.1 83.1,83.1 84.1,83.1 85.1,83.1 86.1,83.1 87.1,83.1 88.1,83.1 89.1,83.1 90.1,83.1 91.1,83.1 92.1,83.1 93.1,83.1 110.1,83.1 111.1,83.1 112.1,83.1 115.1,83.1 116.1,83.1 117.1,83.1 118.1,83.1 75.6,84.1 76.6,84.1 77.6,84.1 78.6,84.1 79.6,84.1 80.6,84.1 81.6,84.1 82.6,84.1 83.6,84.1 84.6,84.1 85.6,84.1 86.6,84.1 87.6,84.1 88.6,84.1 89.6,84.1 90.6,84.1 91.6,84.1 92.6,84.1 93.6,84.1 94.6,84.1 98.6,84.1 99.6,84.1 100.6,84.1 101.6,84.1 102.6,84.1 103.6,84.1 104.6,84.1 105.6,84.1 106.6,84.1 107.6,84.1 108.6,84.1 109.6,84.1 110.6,84.1 111.6,84.1 112.6,84.1 113.6,84.1 114.6,84.1 115.6,84.1 116.6,84.1 117.6,84.1 118.6,84.1 119.6,84.1 75.1,85.1 76.1,85.1 77.1,85.1 78.1,85.1 79.1,85.1 80.1,85.1 81.1,85.1 82.1,85.1 83.1,85.1 84.1,85.1 85.1,85.1 86.1,85.1 87.1,85.1 88.1,85.1 89.1,85.1 90.1,85.1 91.1,85.1 92.1,85.1 93.1,85.1 94.1,85.1 101.1,85.1 102.1,85.1 103.1,85.1 104.1,85.1 105.1,85.1 106.1,85.1 107.1,85.1 108.1,85.1 109.1,85.1 110.1,85.1 111.1,85.1 112.1,85.1 113.1,85.1 114.1,85.1 115.1,85.1 116.1,85.1 117.1,85.1 118.1,85.1 119.1,85.1 120.1,85.1 75.6,86.1 76.6,86.1 77.6,86.1 78.6,86.1 79.6,86.1 80.6,86.1 81.6,86.1 82.6,86.1 83.6,86.1 84.6,86.1 85.6,86.1 86.6,86.1 87.6,86.1 88.6,86.1 89.6,86.1 90.6,86.1 91.6,86.1 92.6,86.1 101.6,86.1 102.6,86.1 103.6,86.1 104.6,86.1 105.6,86.1 106.6,86.1 107.6,86.1 108.6,86.1 109.6,86.1 110.6,86.1 111.6,86.1 112.6,86.1 113.6,86.1 114.6,86.1 115.6,86.1 116.6,86.1 117.6,86.1 118.6,86.1 119.6,86.1 75.1,87.1 76.1,87.1 77.1,87.1 78.1,87.1 79.1,87.1 80.1,87.1 81.1,87.1 82.1,87.1 83.1,87.1 84.1,87.1 85.1,87.1 86.1,87.1 87.1,87.1 88.1,87.1 89.1,87.1 90.1,87.1 91.1,87.1 92.1,87.1 101.1,87.1 102.1,87.1 103.1,87.1 104.1,87.1 105.1,87.1 106.1,87.1 107.1,87.1 108.1,87.1 109.1,87.1 110.1,87.1 111.1,87.1 112.1,87.1 113.1,87.1 114.1,87.1 115.1,87.1 116.1,87.1 117.1,87.1 118.1,87.1 119.1,87.1 120.1,87.1 75.6,88.1 76.6,88.1 77.6,88.1 78.6,88.1 79.6,88.1 80.6,88.1 81.6,88.1 82.6,88.1 83.6,88.1 84.6,88.1 85.6,88.1 86.6,88.1 87.6,88.1 88.6,88.1 89.6,88.1 90.6,88.1 91.6,88.1 92.6,88.1 95.6,88.1 96.6,88.1 97.6,88.1 98.6,88.1 101.6,88.1 102.6,88.1 103.6,88.1 104.6,88.1 105.6,88.1 106.6,88.1 107.6,88.1 108.6,88.1 109.6,88.1 110.6,88.1 111.6,88.1 112.6,88.1 113.6,88.1 114.6,88.1 115.6,88.1 116.6,88.1 117.6,88.1 118.6,88.1 119.6,88.1
KEY_1: R2.2 SW1.1 U1.20 | length 61.5
  Top Layer w0.5: SW1.1@78.093,26.632 78.141,26.68 78.141,34.884 R2.2@78.141,37.844 ; R2.2 84.671,37.935 106.934,60.198 106.934,66.04 103.34,69.634 U1.20
KEY_2: R4.1 SW2.1 U1.21 | length 54.1
  Top Layer w0.5: SW2.1@90.073,26.632 90.121,26.584 90.121,34.884 R4.1@90.121,37.251 ; R4.1 91.656,37.3 107.823,53.467 107.823,66.294 104.34,69.777 U1.21
KEY_3: R7.2 SW3.1 U1.22 | length 49.6
  Top Layer w0.5: SW3.1@101.969,26.378 SW3.1@101.969,34.582 ; SW3.1@102.017,34.63 102.017,37.264 102.796,37.264 109.22,43.688 109.22,66.04 105.34,69.92 U1.22
KEY_4: R9.2 SW4.1 U1.23 | length 48.5
  Top Layer w0.5: U1.23 106.34,70.19 111.887,64.643 111.887,38.354 112.941,37.3 R9.2 ; SW4.1@114.415,26.632 SW4.1@114.415,34.836 ; SW4.1@114.463,34.884 R9.2@114.463,37.264
NetA1_1: A1.1 C1.1 C2.2 | length 3.3
  Top Layer w1: C1.1@117.856,81.407 A1.1
NetC1_2: C1.2 C3.1 U1.35 | length 4.6
  Top Layer w0.5: U1.35 C3.1@114.046,81.407
  Top Layer w1: C3.1@114.046,81.407 C1.2@115.824,81.407
NetC4_2: C4.2 U1.47 X1.2 | length 5.5
  Top Layer w0.5: U1.47 97.34,84.386 97.574,84.62 X1.2 ; X1.2@97.612,85.941 C4.2
NetC7_2: C7.2 U1.48 X1.1 | length 5.5
  Top Layer w0.5: C7.2 X1.1@95.885,86.068 ; X1.1 95.974,84.62 96.34,84.254 U1.48
NetF1_2: F1.2 USB1.1 | length 3.8
  Top Layer w0.4: USB1.1 F1.2@82.931,66.217
NetJ1_2: J1.2 R5.1 | length 3.3
  Top Layer w0.8: R5.1@114.643,52.959 J1.2
NetJ2_3: J2.3 U1.26 | length 7.9
  Top Layer w0.5: U1.26 113.775,72.407 116.459,69.723 J2.3
NetJ2_4: J2.4 U1.27 | length 7.2
  Top Layer w0.5: U1.27 116.839,73.407 J2.4
NetR1_1: R1.1 SW1.2 | length 11
  Top Layer w0.5: SW1.2@82.641,34.884 82.641,26.584 R1.1@85.341,26.584
NetR3_1: R3.1 SW2.2 | length 10.8
  Top Layer w0.5: SW2.2@94.621,34.884 94.621,26.584 R3.1@97.152,26.584
NetR6_1: R6.1 SW3.2 | length 11.1
  Top Layer w0.5: SW3.2@106.517,34.63 106.517,26.33 R6.1@109.344,26.33
NetR8_1: R8.1 SW4.2 | length 10.6
  Top Layer w0.5: SW4.2@118.963,34.884 118.963,26.584 R8.1@121.282,26.584
OLED_CLK: J3.3 U1.14 | length 6.7
  Top Layer w0.5: J3.3 95.25,66.675 97.34,68.765 U1.14
OLED_CS: J3.7 U1.19 | length 7.1
  Top Layer w0.5: U1.19 102.34,68.221 J3.7
OLED_DAT: J3.4 U1.15 | length 6.1
  Top Layer w0.5: J3.4 97.79,67.564 98.34,68.114 U1.15
OLED_DC: J3.6 U1.18 | length 6.5
  Top Layer w0.5: U1.18 101.34,66.681 J3.6
OLED_RST: J3.5 U1.17 | length 5.9
  Top Layer w0.5: J3.5 100.34,65.161 U1.17
ROLE: R5.2 U1.28 | length 32.3
  Top Layer w0.5: U1.28 118.633,74.407 120.269,72.771 120.269,60.452 118.999,59.182 115.57,59.182 114.554,58.166 R5.2
VBUS: C5.1 C11.1 C12.1 F1.1 U1.11 U2.2 | length 21
  Top Layer w0.5: C5.1@88.138,70.396 93.729,70.396 U1.11
  Top Layer w0.8: U2.2@80.62,75.565 80.62,71.272 81.445,70.447 82.931,70.447 ; F1.1 82.931,68.12 82.931,70.447 ; C5.1@88.087,70.447 C11.1 C12.1 82.931,70.447
VDD: C6.1 C9.1 C10.1 J1.1 J2.2 J3.2 R1.2 R3.2 R6.2 R8.2 U1.7 U2.3 | length 176.7
  Top Layer w0.5: U2.3 U2.3@82.276,75.407 ; J3.2 92.71,60.96 91.186,59.436 77.343,59.436 76.327,58.42 76.327,25.527 77.089,24.765 121.069,24.765 R8.2
  Top Layer w0.6: U2.3@82.276,75.407 88.646,75.407 U1.7
  Bottom Layer w0.8: v1(82.169,75.438) 91.059,75.438 92.71,73.787 J3.2 92.71,62.738 94.234,61.214 113.411,61.214 114.554,62.357 ; J1.1 115.57,50.419 114.554,51.435 114.554,62.357 ; J2.2 115.951,67.183 114.554,65.786 114.554,62.357
  other v1: 84.582,75.438 86.614,75.438 88.773,75.438
pads on no net: U1.1 U1.2 U1.3 U1.4 U1.5 U1.6 U1.8 U1.9 U1.16 U1.24 U1.29 U1.30 U1.31 U1.32 U1.33 U1.36 U1.37 U1.38 U1.39 U1.40 U1.41 U1.42 U1.43 U1.44 U1.45 U1.46 U1.49 U1.50 USB1.4

## Polygon pours and split planes (outlines as drawn)
GND on Top Layer "Top Layer-No Net" (solid, pour order 4): 73.787,88.519 73.914,88.392 73.914,24.638 74.168,24.638 74.93,23.876 126.873,23.876 128.016,25.019 127.762,25.273 127.762,88.519 126.492,89.789 75.184,89.789
GND on Bottom Layer "Top Layer-No Net" (solid, pour order 8): 74.676,23.876 73.787,24.765 73.787,88.519 74.041,88.519 75.311,89.789 126.365,89.789 126.492,89.789 127.762,88.519 127.762,24.765 126.873,23.876

## Keep-outs
Keep-Out Layer:
  pour cut-out: 120.523,89.408 120.904,89.789 126.238,89.789 127.762,88.265 127.762,24.765 127.254,24.257 121.666,24.257 121.539,28.448 121.988,28.448 120.523,28.448
  lines w0.254: 73.787,24.765 74.676,23.876 78.867,23.876 126.873,23.876 127.762,24.765 127.762,88.519 126.492,89.789 75.057,89.789 73.787,88.519 73.787,24.765

## Text inside footprints (layer, text, board x,y; h text height)
J3: Top Overlay "G" at 89.657,61.939 h1.52; Top Overlay "V" at 92.324,61.812 h1.52; Top Overlay "C" at 94.864,61.939 h1.52; Top Overlay "D" at 97.404,61.939 h1.52; Top Overlay "R" at 99.944,61.939 h1.52; Top Overlay "dc" at 101.849,62.066 h1.52; Top Overlay "cs" at 105.151,62.066 h1.52